# Altium PCB Display_System_pcb.PcbDoc (part 2 of 3)
Units mm, origin at the board's own origin, x right, y up, seen from the top; angles counter-clockwise.
Board outline 72.5 x 81 mm, 4 copper layers (Top Layer, VCC, GND, Bottom Layer); 86 components, 79 nets, 327 pads, 149 vias.
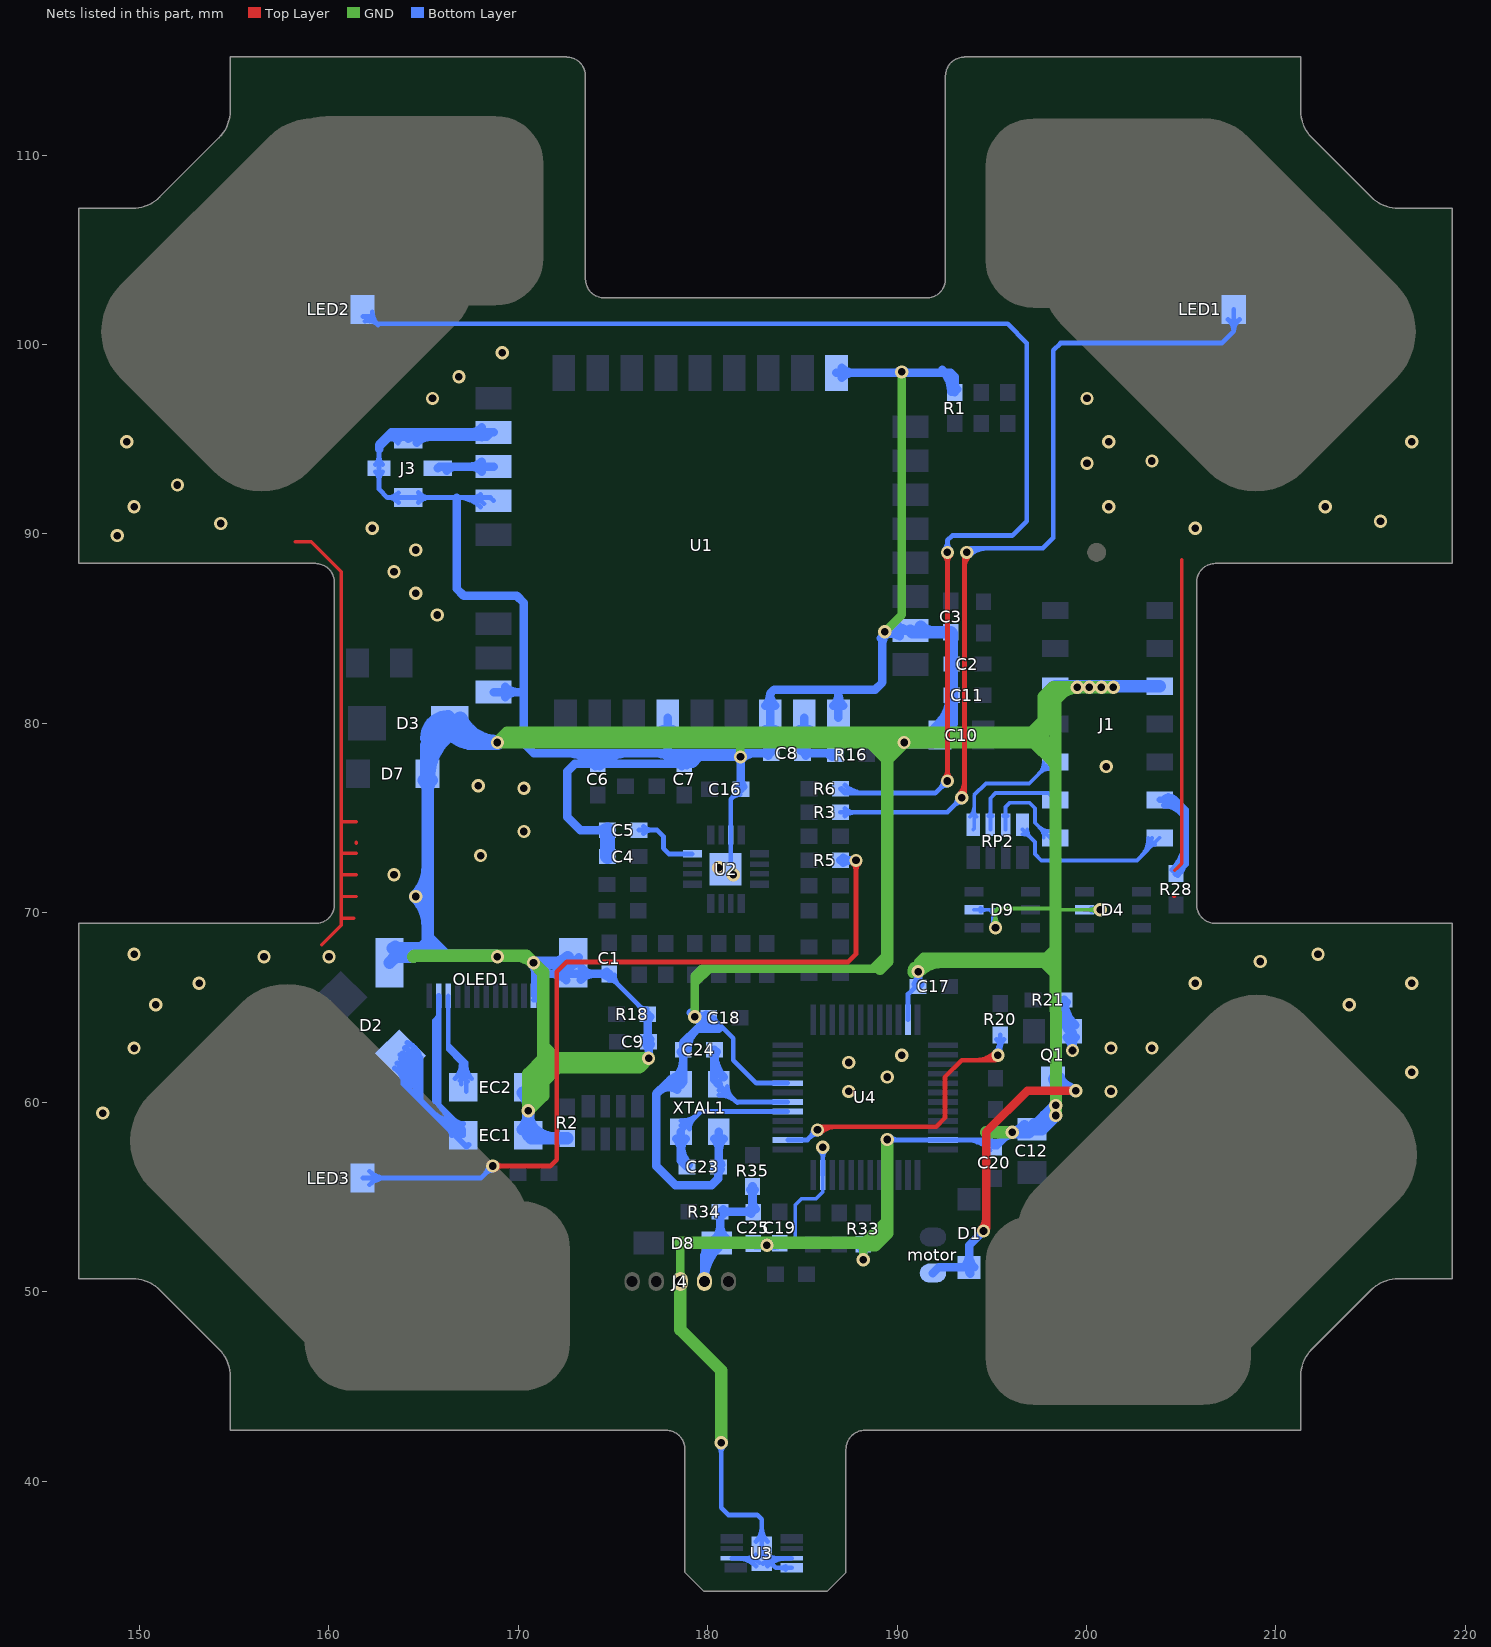
[diagram p4: the nets of this part, all layers, seen from the top]

## Via types
v1: diameter 0.7, hole 0.4, Top Layer to Bottom Layer, tented both sides, 149 vias

## Nets (pads, with @x,y where several pads share a name; then routed paths per layer and width w, separated by ;. In a path a pad name is that pad's centre, name@x,y a point inside that pad or via, vN(x,y) a via of type N, cw(c..) or ccw(c..) an arc to the next point about the centre after c; other vN are vias at no path point) (continued)
GND: C1.1 C2.1 C3.1 C4.1 C5.1 C6.1 C7.1 C8.1 C9.2 C10.2 C11.1 C12.2 C16.2 C17.1 C18.1 C19.1 C20.2 C23.2 C24.2 C25.1 D3.2 D4.2 D7.2 D9.2 EC1.2 EC2.2 J1.3 J1.10 J3.1 J3.2 J3.4 J4.3 OLED1.1 OLED1.13 OLED1.14 Q1.2 R1.1 R2.1 R18.1 R21.1 R33.1 U1.1 U1.5 U1.7 U1.17 U1.24 U1.26 U1.28 U1.31 U2.7 U2.17 U3.2 U3.7 U3.8 U4.8 U4.23 U4.35 U4.47 XTAL1.2 XTAL1.4 | length 690.3
  Top Layer w0.178: 158.229,89.595 159.083,89.595 160.671,88.008 160.671,69.358 159.639,68.326 ; 160.671,69.723 161.335,69.723 ; 160.676,74.808 161.459,74.808 ; 160.798,70.866 161.459,70.866 ; 160.798,72.009 161.459,72.009 ; 160.798,73.152 161.459,73.152 ; 161.459,73.66 161.459,73.745 ; 204.597,70.866 204.654,70.866 ; 204.654,72.241 205.022,72.608 ; 204.78,72.366 205.022,72.608 ; 205.022,88.645 205.022,72.608
  GND w0.2: v1@195.022,69.392 ccw(c194.595,69.819) 195.199,69.819 ccw(c195.803,69.819) v1@195.376,69.392 ; v1@195.199,69.342 195.199,70.104 195.326,70.231 198.36,70.231 ; 198.421,70.165 v1(200.726,70.165) ; v1@200.549,69.988 ccw(c200.122,69.561) 200.122,70.165 ccw(c200.122,70.769) v1@200.549,70.342
  GND w0.45: J4.3@178.438,50.77 ccw(c178.14,51.068) 178.562,51.068 ccw(c178.984,51.068) J4.3@178.686,50.77 ; J4.3@178.562,50.546 178.562,52.465 ; v1(179.324,64.516) 179.324,66.294 179.337,66.307 ; v1(181.737,78.232) 181.737,78.867 ; v1(188.214,51.689) 188.214,52.451 ; 188.976,67.056 188.722,67.056 ; 189.103,67.056 188.722,67.056 ; v1(189.357,84.836) 190.246,85.725 v1(190.246,98.552) ; 189.484,67.818 188.722,67.056 ; v1@190.805,66.79 cw(c191.165,66.924) 190.893,67.195 ; v1@190.88,67.133 cw(c191.306,66.707) 191.306,67.31 ; v1@191.198,66.815 cw(c192.393,65.621) 192.393,67.31 ; v1@191.227,66.947 cw(c191.887,67.193) 191.389,67.691 ; 198.36,66.675 197.725,67.31 197.485,67.31 ; 198.36,67.31 197.485,67.31 ; 198.36,67.691 197.866,67.691 ; 198.36,68.185 197.866,67.691 ; 179.337,66.307 180.086,67.056 ; 179.337,66.307 179.337,66.688 179.705,67.056 180.086,67.056 ; 180.086,67.056 188.722,67.056 ; 191.389,67.691 197.866,67.691 ; 191.389,67.691 191.11,67.412 v1(191.11,66.904) 191.516,67.31 197.485,67.31
  GND w0.65: 164.465,67.691 164.515,67.741 170.444,67.741 v1(170.815,67.37) 171.323,66.862 171.323,63.246 ; 169.859,67.741 cw(c169.859,66.414) v1@170.797,67.352 ; v1@170.518,59.581 ccw(c169.572,60.527) 170.91,60.527 ; 170.815,60.579 172.085,61.849 ; 170.91,59.937 170.91,60.928 171.323,60.515 ; J4.3@178.562,50.546 178.562,48.006 180.721,45.847 v1(180.721,42.037) ; 178.562,52.592 186.944,52.592 ; 182.767,52.592 cw(c182.767,52.098) v1@183.116,52.447 ; v1@183.152,52.447 cw(c183.501,52.098) 183.501,52.592 ; 187.579,52.578 188.214,52.578 ; 187.579,52.592 186.944,52.592 ; 188.228,52.592 186.944,52.592 ; 188.835,52.465 188.228,52.465 ; 189.086,79.502 cw(c189.086,77.707) v1@190.355,78.976 ; 189.103,67.056 189.484,67.437 189.484,67.818 189.484,78.105 ; v1(189.484,58.039) 189.484,53.721 ; v1@190.391,78.976 cw(c191.66,77.707) 191.66,79.502 ; 194.691,58.42 v1(196.088,58.42) ; 198.247,77.978 197.231,78.994 ; v1@198.39,59.309 198.36,70.231 198.36,78.64 ; 198.607,81.513 cw(c199.517,80.603) v1@199.517,81.89 ; 198.755,81.661 cw(c199.348,81.068) v1@199.512,81.89 ; v1(201.422,81.915) v1(200.152,81.915) v1(199.517,81.915) 199.009,81.915 ; v1(170.536,59.563) 171.323,60.35 171.323,61.404 171.221,61.302 170.536,61.302 v1(170.536,59.563) ; v1(170.536,59.563) 170.536,61.507 171.323,62.293 171.323,62.357 ; 171.323,62.357 171.323,63.246 ; 171.323,62.357 171.323,61.849 172.085,61.849 ; 171.323,63.246 171.323,62.992 171.983,62.332 v1(176.886,62.332) 176.403,61.849 172.085,61.849 ; 188.228,52.465 189.484,53.721 ; 188.228,52.465 188.214,52.451 188.849,52.451 189.484,53.086 189.484,53.721 ; 188.595,78.994 v1(168.91,78.994) 169.418,79.502 197.104,79.502 197.739,80.137 ; 188.595,78.994 189.484,78.994 ; 188.595,78.994 189.484,78.105 ; 189.484,78.105 189.484,78.994 ; 189.484,78.105 v1(190.373,78.994) ; 189.484,78.994 v1(190.373,78.994) ; v1(190.373,78.994) 197.231,78.994 ; 197.231,78.994 198.006,78.994 198.36,78.64 ; 197.231,78.994 197.739,79.502 197.739,80.137 ; 197.739,80.137 197.739,81.407 198.247,81.915 199.009,81.915 ; 198.36,78.64 198.36,81.266 199.009,81.915
  Bottom Layer w0.2: C19.1@183.819,52.562 184.388,52.562 ; C19.1@184.075,52.393 cw(c184.388,52.187) 184.388,52.562 ; C19.1@184.075,52.731 ccw(c184.388,52.937) 184.388,52.562 ; U4.47@186.08,56.167 186.08,55.27 185.72,54.91 184.958,54.91 184.625,54.577 184.625,52.799 184.388,52.562 ; D9.2@194.056,70.165 194.884,70.165 ; D9.2@194.412,70.059 cw(c194.668,69.803) 194.668,70.165 cw(c194.668,70.527) D9.2@194.412,70.271 ; v1@195.022,69.392 ccw(c194.743,69.671) 195.138,69.671 ; 195.072,69.573 ccw(c195.472,69.573) v1@195.229,69.255 ; v1@195.138,69.276 195.138,70.165 194.884,70.165 ; 195.138,69.966 ccw(c195.95,69.966) v1@195.376,69.392 ; v1@195.199,69.342 195.072,69.469 195.072,69.977 ; v1@195.351,69.414 cw(c195.781,69.977) 195.072,69.977 ; R21.1@198.602,65.188 cw(c198.079,64.665) 198.819,64.665 cw(c199.558,64.665) R21.1@199.035,65.188 ; Q1.2@198.819,64.263 ccw(c199.488,64.263) Q1.2@199.108,63.712 ; 198.819,64.644 ccw(c199.75,64.644) Q1.2@199.222,63.876 ; R21.1@198.819,65.024 ccw(c200.012,65.024) Q1.2@199.335,64.041 ; Q1.2@198.923,63.296 cw(c198.613,62.82) v1@199.181,62.82 ; v1@199.086,62.915 ccw(c198.857,63.144) Q1.2@199.181,63.144 ; Q1.2@199.181,63.539 ccw(c200.064,63.539) v1@199.44,62.915 ; v1(199.263,62.738) v1@199.181,62.82 ; Q1.2@199.439,63.296 ccw(c199.749,62.82) v1@199.181,62.82 ; Q1.2@199.449,64.206 cw(c200.275,65.405) R21.1@198.819,65.405 198.819,64.117 Q1.2@199.181,63.754 v1@199.181,62.82 ; D4.2@199.898,70.165 v1(200.726,70.165) ; D4.2@200.254,70.059 cw(c200.51,69.803) 200.51,70.165 cw(c200.51,70.527) D4.2@200.254,70.271 ; v1@200.549,69.988 ccw(c200.122,69.561) 200.122,70.165 ccw(c200.122,70.769) v1@200.549,70.342 ; 194.884,70.165 195.072,69.977
  Bottom Layer w0.25: J3.4@162.467,93.278 cw(c161.997,92.808) 162.661,92.808 cw(c163.325,92.808) J3.4@162.855,93.278 ; J3.4@162.467,93.666 ccw(c161.997,94.136) 162.661,94.136 ccw(c163.325,94.136) J3.4@162.855,93.666 ; J3.1@163.659,94.8 ccw(c163.221,94.479) 163.221,95.022 ; J3.1@163.659,95.244 cw(c163.221,95.565) 163.221,95.022 ; J3.2@163.688,91.665 ccw(c163.094,91.107) 163.094,91.922 ccw(c163.094,92.737) J3.2@163.688,92.179 ; J3.2@164.726,91.657 cw(c165.366,91.017) 165.366,91.922 cw(c165.366,92.827) J3.2@164.726,92.187 ; J3.1@164.726,94.757 cw(c165.366,94.117) 165.366,95.022 cw(c165.366,95.927) J3.1@164.726,95.287 ; D3.2@165.989,80.01 D3.2@166.395,80.01 ; 166.397,95.022 ccw(c166.397,97.316) U1.7@168.019,95.694 ; 166.812,91.922 cw(c166.812,90.215) U1.5@168.019,91.422 ; 167.001,95.022 ccw(c167.001,96.712) U1.7@168.196,95.517 ; 167.416,91.922 cw(c167.416,90.819) U1.5@168.196,91.599 ; 167.604,91.922 ccw(c167.604,92.509) U1.5@168.019,92.094 ; 167.604,95.022 ccw(c167.604,96.109) U1.7@168.373,95.34 ; U1.5@168.705,91.758 168.541,91.922 166.751,91.922 J3.2@164.211,91.922 163.094,91.922 162.661,92.355 J3.4@162.661,93.472 162.661,94.462 163.221,95.022 ; U1.7@168.705,95.358 168.369,95.022 J3.1@164.211,95.022 163.221,95.022 ; v1@170.757,67.152 cw(c170.65,66.748) 171.069,66.748 ; OLED1.1@170.803,66.142 ccw(c170.574,66.581) 171.069,66.581 ; OLED1.1@170.815,65.405 171.323,65.405 ; v1@170.815,67.145 cw(c170.815,66.602) 171.199,66.986 cw(c171.583,67.37) v1@171.04,67.37 ; v1(170.815,67.37) OLED1.1@170.815,65.62 ; v1@170.821,67.394 cw(c170.736,67.073) 171.069,67.073 ; OLED1.1@170.824,65.597 cw(c170.955,65.252) 171.215,65.513 ; v1@170.833,67.388 cw(c170.475,67.03) 170.981,67.03 ; OLED1.1@170.919,65.921 ccw(c170.79,66.168) 171.069,66.168 ; v1@170.974,67.211 ccw(c171.358,66.827) 170.815,66.827 ccw(c170.272,66.827) 170.656,67.211 cw(c169.871,66.426) 170.981,66.426 ; 170.981,65.978 cw(c170.957,65.978) 170.974,65.961 ccw(c170.745,66.19) 171.069,66.19 ; 170.981,66.581 cw(c170.354,66.581) 170.797,66.138 ccw(c170.141,66.794) 171.069,66.794 ; 171.035,65.699 ccw(c171.006,65.755) 171.069,65.755 ; 171.069,66.548 171.704,67.183 ; 171.141,65.46 ccw(c170.815,65.134) 170.815,65.595 cw(c170.815,64.827) 171.358,65.37 ; 171.196,66.802 171.196,65.405 170.981,65.62 ; 171.323,66.862 171.069,67.116 ; 171.323,67.37 171.323,65.405 ; 171.45,67.183 171.069,66.802 ; C1.1@174.802,66.457 cw(c174.802,65.898) 175.197,66.293 ; C1.1@174.802,66.777 174.802,66.689 R18.1@176.847,64.643 ; C1.1@175.083,66.739 ccw(c175.883,66.739) 175.318,66.173 ; 176.302,65.188 cw(c175.757,64.643) R18.1@176.528,64.643 ; 176.394,65.096 ccw(c176.809,65.512) R18.1@176.809,64.924 ; C9.2@176.847,63.234 C9.2@176.886,63.196 ; C24.2@178.689,62.813 C24.2@178.714,62.788 ; C18.1@180.011,64.516 180.213,64.516 181.356,63.373 181.356,62.23 182.569,61.017 U4.8@184.23,61.017 ; C18.1@180.099,64.185 cw(c180.099,63.109) 180.86,63.869 ; C18.1@180.38,64.466 ccw(c180.663,64.466) C18.1@180.463,64.266 ; v1@180.562,41.878 cw(c180.178,41.494) 180.721,41.494 cw(c181.264,41.494) v1@180.88,41.878 ; C23.2@180.569,56.592 C23.2@180.594,56.617 ; v1(180.721,42.037) 180.721,38.608 181.102,38.227 182.626,38.227 182.86,37.993 U3.2@182.86,36.175 ; U2.17@181.229,72.581 U2.7@181.229,74.105 181.229,75.998 C16.2@181.762,76.531 ; 181.248,76.017 ccw(c180.776,76.489) C16.2@181.443,76.519 ; U3.2@181.283,35.941 182.626,35.941 U3.2@182.86,36.175 ; 181.309,76.078 cw(c181.724,75.662) C16.2@181.724,76.25 ; U3.2@181.554,35.941 cw(c181.554,34.519) U3.2@182.559,35.524 ; 182.114,35.941 ccw(c182.114,36.571) U3.2@182.559,36.126 ; 182.157,35.941 cw(c182.157,35.122) U3.2@182.736,35.701 ; U3.2@182.559,36.826 ccw(c181.834,37.551) 182.86,37.551 ccw(c183.886,37.551) U3.2@183.161,36.826 ; U3.2@182.88,36.195 U3.2@182.86,36.175 ; U3.2@182.921,35.661 cw(c183.112,35.145) 183.501,35.534 ; U3.2@182.984,35.701 cw(c183.563,35.122) 183.563,35.941 ; U3.2@183.161,35.524 cw(c184.166,34.519) U3.7@184.166,35.941 ; U3.2@183.161,36.126 ccw(c183.606,36.571) 183.606,35.941 ; C8.1@183.305,78.24 C8.1@183.305,78.436 ; C8.1@183.305,78.486 C8.1@183.305,78.436 ; C8.1@183.363,78.436 C8.1@183.305,78.436 ; U3.8@184.124,35.345 ccw(c183.91,35.131) 183.91,35.433 ccw(c183.91,35.735) U3.8@184.124,35.521 ; U3.8@184.437,35.433 183.602,35.433 U3.2@183.094,35.941 ; U3.7@184.437,35.941 U3.2@183.094,35.941 ; v1@185.921,57.474 cw(c185.537,57.089) 186.08,57.089 cw(c186.624,57.089) v1@186.239,57.474 ; U4.47@186.08,56.167 v1(186.08,57.633) ; v1@189.506,58.017 U4.35@192.43,58.017 194.737,58.017 C20.2@195.122,57.633 195.301,57.633 v1(196.088,58.42) ; v1@189.643,57.88 cw(c189.975,57.548) 189.975,58.017 ; v1@189.643,58.198 ccw(c190.079,58.634) 190.079,58.017 ; U4.23@190.58,64.367 190.58,65.715 C17.1@191.11,66.244 ; 193.606,58.017 cw(c193.606,56.154) C20.2@194.923,57.472 ; 194.209,58.017 cw(c194.209,56.758) C20.2@195.1,57.648 ; C20.2@194.813,58.017 cw(c194.813,57.361) C20.2@195.277,57.825 ; C20.2@195.122,57.702 ccw(c195.122,58.301) 195.546,57.878 ; C20.2@195.122,57.952 ccw(c195.122,59.155) v1@195.972,58.304 ; v1@195.863,58.42 cw(c195.32,58.42) 195.704,58.036 cw(c196.088,57.652) v1@196.088,58.195 ; OLED1.1@170.815,65.62 171.108,65.62 171.323,65.405 ; OLED1.1@170.815,65.62 170.981,65.62 ; 170.981,65.62 170.981,67.028 171.069,67.116 ; 171.069,66.802 171.069,65.659 171.323,65.405 ; 171.069,66.802 171.069,67.116 ; U3.2@182.86,36.175 U3.2@183.094,35.941
  Bottom Layer w0.45: 162.661,94.462 162.661,94.716 163.303,95.358 ; 162.762,94.817 cw(c163.732,93.847) J3.1@163.994,95.194 ; J3.1@163.687,95.002 ccw(c163.303,94.973) 163.303,95.358 ; J3.1@164.211,95.022 J3.1@164.547,95.358 ; J3.1@164.337,95.146 cw(c164.85,94.633) J3.1@164.85,95.358 ; J3.1@164.655,94.828 cw(c165.936,93.547) 165.936,95.358 ; 166.751,91.922 166.751,87.122 167.132,86.741 169.926,86.741 170.307,86.36 170.307,81.658 ; U1.7@168.09,95.093 ccw(c167.45,94.453) 167.45,95.358 ccw(c167.45,96.263) U1.7@168.09,95.623 ; U1.1@168.705,81.658 170.307,81.658 ; U1.7@168.705,95.358 J3.1@164.547,95.358 ; U1.1@169.32,81.393 cw(c169.96,80.753) 169.96,81.658 cw(c169.96,82.563) U1.1@169.32,81.923 ; EC1.2@170.165,58.639 ccw(c169.269,59.535) 170.536,59.535 ccw(c171.803,59.535) EC1.2@170.907,58.639 ; EC2.2@170.165,60.436 cw(c169.269,59.54) 170.536,59.54 cw(c171.803,59.54) EC2.2@170.907,60.436 ; EC1.2@170.536,58.395 EC2.2@170.536,60.935 ; 171.111,66.777 173.99,66.777 ; 171.543,66.777 ccw(c171.543,68.192) OLED1.14@172.544,67.191 ; 171.752,66.777 cw(c171.752,65.657) OLED1.14@172.544,66.449 ; 172.497,78.436 cw(c172.497,76.218) C6.1@174.066,77.786 ; OLED1.14@172.915,67.37 OLED1.14@173.211,67.666 ; OLED1.14@173.211,66.777 173.99,66.777 ; 173.583,78.436 cw(c173.583,77.304) C6.1@174.384,78.104 ; 173.686,78.423 cw(c173.718,78.39) 173.718,78.436 ; C6.1@174.004,78.104 cw(c174.805,77.304) 174.805,78.436 ; C6.1@174.066,77.748 ccw(c173.756,77.438) 173.756,77.876 ccw(c173.756,78.314) C6.1@174.066,78.005 ; C6.1@174.322,77.748 cw(c174.632,77.438) 174.632,77.876 cw(c174.632,78.314) C6.1@174.322,78.005 ; C6.1@174.322,77.786 cw(c175.891,76.218) 175.891,78.436 ; C5.1@174.56,74.244 ccw(c174.251,73.934) 174.251,74.372 ccw(c174.251,74.81) C5.1@174.56,74.5 ; 174.67,78.436 cw(c174.67,78.39) 174.702,78.423 ; C1.1@174.674,66.648 ccw(c174.364,66.339) 174.364,66.777 ccw(c174.364,67.215) C1.1@174.674,66.905 ; C5.1@174.727,74.372 173.278,74.372 172.593,75.057 172.593,77.47 172.999,77.876 C6.1@174.194,77.876 C7.1@178.766,77.876 179.222,77.876 179.578,78.232 ; C1.1@174.802,66.777 173.99,66.777 ; C9.2@176.719,63.324 ccw(c176.41,63.634) 176.847,63.634 ccw(c177.285,63.634) C9.2@176.976,63.324 ; R18.1@176.719,64.515 cw(c176.41,64.205) 176.847,64.205 cw(c177.285,64.205) R18.1@176.976,64.515 ; C9.2@176.757,63.068 cw(c176.448,62.758) 176.886,62.758 cw(c177.324,62.758) C9.2@177.014,63.068 ; C9.2@176.847,63.234 R18.1@176.847,64.643 ; v1(176.886,62.332) C9.2@176.886,63.196 ; 177.069,78.436 cw(c177.069,76.218) C7.1@178.638,77.786 ; 177.403,60.563 cw(c177.967,59.999) XTAL1.4@178.403,60.667 ; 177.419,60.579 cw(c178.343,59.654) XTAL1.4@178.615,60.933 ; U1.31@177.64,79.693 cw(c177,79.053) 177.905,79.053 cw(c178.81,79.053) U1.31@178.17,79.693 ; 177.795,60.955 cw(c178.276,60.474) XTAL1.4@178.649,61.044 ; 177.905,78.541 U1.31@177.905,80.308 ; 178.005,61.165 cw(c178.548,60.621) XTAL1.4@178.708,61.373 ; 178.155,78.436 cw(c178.155,77.304) C7.1@178.956,78.104 ; 178.258,78.423 cw(c178.29,78.39) 178.29,78.436 ; XTAL1.4@178.336,60.724 ccw(c177.8,60.234) 177.8,60.96 ; XTAL1.4@178.336,61.196 cw(c177.8,61.686) 177.8,60.96 ; XTAL1.4@178.347,61.332 ccw(c177.458,62.221) 178.714,62.221 ; C7.1@178.576,78.104 cw(c179.377,77.304) 179.377,78.436 ; C24.2@178.586,62.66 cw(c178.276,62.35) 178.714,62.35 cw(c179.152,62.35) C24.2@178.843,62.66 ; C7.1@178.638,77.748 ccw(c178.328,77.438) 178.328,77.876 ccw(c178.328,78.314) C7.1@178.638,78.005 ; C7.1@178.835,78.082 ccw(c179.094,78.716) 179.578,78.232 ; C7.1@178.894,77.786 cw(c180.463,76.218) 180.463,78.436 ; C7.1@178.928,77.833 cw(c179.578,77.503) 179.578,78.232 ; C24.2@178.934,62.788 cw(c180.324,62.788) 179.341,63.771 ; v1@179.113,64.727 ccw(c179.589,65.203) C18.1@179.931,64.622 ; C7.1@179.122,78.232 179.578,78.232 ; 179.242,78.436 cw(c179.242,78.39) 179.274,78.423 ; v1@179.464,64.516 cw(c179.464,63.907) C18.1@179.894,64.338 ; v1@179.525,64.315 ccw(c179.894,64.685) C18.1@180.159,64.234 ; 179.959,63.881 v1(179.324,64.516) 180.011,64.516 C18.1@180.061,64.466 ; XTAL1.2@180.347,58.088 cw(c179.749,57.49) 180.594,57.49 cw(c181.439,57.49) XTAL1.2@180.841,58.088 ; C23.2@180.44,56.464 cw(c180.131,56.154) 180.569,56.154 cw(c181.007,56.154) C23.2@180.697,56.464 ; C23.2@180.478,56.72 ccw(c180.199,56.999) 180.594,56.999 ; C23.2@180.569,56.592 180.569,55.982 180.213,55.626 178.308,55.626 177.292,56.642 177.292,60.452 177.8,60.96 ; C23.2@180.594,56.617 XTAL1.2@180.594,58.46 ; 180.594,57.061 ccw(c181.075,57.061) C23.2@180.735,56.72 ; 180.594,63.881 179.451,63.881 178.714,63.144 C24.2@178.714,62.788 178.714,61.08 XTAL1.4@178.594,60.96 177.8,60.96 ; 180.943,78.436 cw(c180.943,77.438) 181.649,78.144 cw(c181.374,77.869) 181.762,77.869 ; v1@181.61,78.232 179.578,78.232 ; C16.2@181.634,76.659 ccw(c181.324,76.969) 181.762,76.969 ccw(c182.2,76.969) C16.2@181.891,76.659 ; C16.2@181.762,76.531 v1@181.762,78.08 ; v1@181.825,78.144 cw(c182.531,77.438) 182.531,78.436 ; C25.1@182.422,52.553 182.524,52.451 183.708,52.451 C19.1@183.819,52.562 cw(c183.516,52.865) v1@183.22,52.555 ; C25.1@182.55,52.643 ccw(c183.013,53.106) v1@183.013,52.451 ; U1.28@183.04,79.693 cw(c182.4,79.053) 183.305,79.053 cw(c184.21,79.053) U1.28@183.57,79.693 ; U1.28@183.04,80.923 ccw(c182.4,81.563) 183.305,81.563 ccw(c184.21,81.563) U1.28@183.57,80.923 ; C8.1@183.196,78.308 ccw(c182.887,77.998) 182.887,78.436 ccw(c182.887,78.874) C8.1@183.196,78.564 ; v1@183.205,52.451 ccw(c183.205,53.138) C19.1@183.691,52.652 ; C8.1@183.305,78.436 170.815,78.436 170.307,78.944 170.307,81.658 ; C8.1@183.305,78.486 U1.28@183.305,80.308 183.305,81.578 183.515,81.788 186.905,81.788 ; 183.305,78.921 ccw(c183.81,78.921) C8.1@183.453,78.564 ; U1.26@186.64,80.923 ccw(c186,81.563) 186.905,81.563 ccw(c187.81,81.563) U1.26@187.17,80.923 ; U1.17@186.805,98.508 192.83,98.508 193.04,98.298 R1.1@193.04,97.472 193.04,98 192.532,98.508 ; U1.26@186.905,80.308 186.905,81.788 ; U1.17@187.07,98.243 cw(c187.71,97.603) 187.71,98.508 cw(c187.71,99.413) U1.17@187.07,98.773 ; R33.1@188.086,52.348 cw(c187.776,52.038) 188.214,52.038 cw(c188.652,52.038) R33.1@188.342,52.348 ; v1(188.214,51.689) R33.1@188.214,52.514 ; 189.146,84.498 cw(c189.701,83.943) U1.24@190.144,84.591 ; 189.23,84.228 cw(c189.965,84.228) 189.445,84.748 cw(c189.815,84.378) U1.24@189.815,84.901 ; v1@189.363,84.715 cw(c190.087,83.991) U1.24@190.376,84.973 ; v1@189.53,84.882 cw(c190.012,84.399) U1.24@190.397,84.963 ; 189.838,98.508 ccw(c189.838,98.96) v1@190.158,98.64 ; U1.24@190.068,84.659 ccw(c189.549,84.222) v1@189.549,84.901 ; U1.24@190.068,85.142 cw(c189.549,85.58) v1@189.549,84.901 ; v1@190.334,98.64 ccw(c190.654,98.96) 190.654,98.508 ; U1.24@190.705,84.901 v1@189.549,84.901 ; C17.1@190.981,66.245 ccw(c190.672,66.555) 191.11,66.555 ccw(c191.548,66.555) C17.1@191.238,66.245 ; C17.1@191.11,66.244 v1@191.11,67.031 ; 192.384,98.656 cw(c191.239,97.511) R1.1@192.859,97.511 ; C3.1@192.746,84.901 C3.1@192.836,84.811 ; R1.1@192.912,97.639 ccw(c192.602,97.949) 193.04,97.949 ccw(c193.478,97.949) R1.1@193.168,97.639 ; R21.1@198.69,65.277 cw(c198.381,64.967) 198.819,64.967 cw(c199.256,64.967) R21.1@198.947,65.277 ; Q1.2@198.819,64.117 199.263,63.672 v1(199.263,62.738) ; 198.819,64.397 ccw(c199.701,64.397) Q1.2@199.112,63.74 ; R21.1@198.819,65.405 ccw(c200.604,65.405) Q1.2@199.412,64.076 ; Q1.2@198.95,63.432 cw(c198.329,62.735) v1@199.263,62.735 ; v1@199.263,63.052 cw(c199.82,63.052) Q1.2@199.426,63.445 ; 163.303,95.358 J3.1@164.547,95.358 ; 173.99,66.777 ccw(c173.99,65.861) 173.307,66.471 cw(c173.99,65.861) 173.99,66.777 ; 173.99,66.777 cw(c173.99,67.552) 173.349,67.116 ccw(c173.99,67.552) 173.99,66.777 ; 186.905,81.788 188.849,81.788 189.23,82.169 189.23,84.582 v1@189.549,84.901
  Bottom Layer w0.65: OLED1.13@163.215,67.37 163.536,67.691 164.465,67.691 ; OLED1.13@163.386,68.135 164.909,68.135 ; OLED1.13@163.516,67.619 cw(c164.761,66.374) 164.761,68.135 ; OLED1.13@163.516,68.221 ccw(c164.673,69.378) 164.673,67.741 ; OLED1.13@163.564,68.162 ccw(c164.465,68.787) 164.465,67.691 ; OLED1.13@163.586,67.741 165.227,67.741 ; v1@164.574,70.848 cw(c162.999,69.273) 165.227,69.273 ; v1@164.574,70.884 ccw(c162.999,72.459) 165.227,72.459 ; D7.2@165.008,76.997 cw(c164.479,76.468) 165.227,76.468 cw(c165.975,76.468) D7.2@165.446,76.997 ; 165.227,68.453 164.909,68.135 ; 165.227,68.707 166.193,67.741 ; D7.2@165.227,77.343 165.227,67.741 ; v1@168.86,67.741 165.227,67.741 ; EC1.2@170.235,58.568 ccw(c169.51,59.294) 170.536,59.294 ccw(c171.562,59.294) 170.837,58.568 ccw(c171.961,59.692) 171.961,58.102 ; EC2.2@170.235,60.507 cw(c169.51,59.782) 170.536,59.782 cw(c171.562,59.782) EC2.2@170.837,60.507 ; EC2.2@170.536,60.808 EC1.2@170.536,58.268 170.701,58.102 R2.1@172.593,58.102 ; v1(170.815,67.37) OLED1.14@172.915,67.37 ; OLED1.14@172.614,67.069 ccw(c171.889,66.344) 171.889,67.37 ccw(c171.889,68.396) OLED1.14@172.614,67.671 ; v1(190.373,78.994) 191.877,78.994 C10.2@192.268,79.385 192.888,80.005 C11.1@192.888,81.484 ; U1.24@190.705,84.901 190.795,84.811 C3.1@192.836,84.811 192.888,84.759 C2.1@192.888,83.135 C11.1@192.888,81.484 ; 191.051,78.994 ccw(c191.051,80.44) C10.2@192.074,79.417 ; U1.24@191.249,85.095 ccw(c191.937,85.783) 191.937,84.811 ; C10.2@192.09,79.756 ccw(c190.619,81.484) C11.1@192.888,81.484 ; C10.2@192.511,79.261 ccw(c191.817,80.077) 192.888,80.077 ; C12.2@196.731,58.744 cw(c196.088,59.219) v1(196.088,58.42) 196.953,58.42 C12.2@197.114,58.581 ; C12.2@197.277,58.856 ccw(c197.28,60.403) v1(198.374,59.309) ; C12.2@197.424,58.89 cw(c198.374,57.94) v1@198.374,59.284 ; C12.2@197.551,58.581 cw(c198.606,58.581) 197.86,59.327 ; 197.955,58.89 ccw(c197.005,59.841) v1@198.349,59.841 ; J1.10@198.349,81.962 J1.3@203.86,81.962 ; 164.465,67.691 164.909,68.135 ; C12.2@197.114,58.581 197.646,58.581 v1(198.374,59.309) ; C12.2@197.114,58.581 v1(198.374,59.841) v1(198.374,59.309)
  Bottom Layer w0.8: D7.2@165.227,77.137 cw(c168.143,77.137) D3.2@166.565,79.589 ; D7.2@165.227,77.343 165.227,78.842 D3.2@166.395,80.01 167.411,78.994 v1(168.91,78.994) cw(c168.91,81.175) D3.2@166.945,80.227 ; 165.227,78.427 cw(c166.31,78.427) D3.2@166.3,79.51 ; 165.227,78.603 cw(c167.2,78.603) D3.2@166.133,80.262 ; 165.227,79.235 cw(c166.302,79.235) D3.2@166.292,80.31 ; 165.371,78.986 ccw(c164.346,80.01) D3.2@165.795,80.01 ; D3.2@165.612,79.227 cw(c166.295,78.544) D3.2@166.295,79.51 ; D3.2@166.225,79.88 ccw(c167.636,80.56) 167.636,78.994 ; D3.2@166.495,79.51 cw(c166.495,78.544) D3.2@167.178,79.227 ; D3.2@166.995,79.988 ccw(c168.249,79.932) 167.361,79.044 ; C4.1@174.727,72.975 C5.1@174.727,74.372
  other v1: 183.134,52.465 148.082,59.436 187.452,60.579 201.295,60.579 189.484,61.341 217.17,61.595 187.452,62.103 190.246,62.484 149.733,62.865 201.295,62.865 203.454,62.865 150.876,65.151 213.868,65.151 153.162,66.294 205.74,66.294 217.17,66.294 209.169,67.437 156.591,67.691 160.02,67.691 168.91,67.691 149.733,67.818 212.217,67.818 195.199,69.215 164.592,70.866 163.449,72.009 181.356,72.009 180.594,72.39 168.021,73.025 170.307,74.295 170.307,76.581 167.894,76.708 201.041,77.724 200.787,81.915 165.735,85.725 164.592,86.868 163.449,88.011 164.592,89.154 148.844,89.916 162.306,90.297 205.74,90.297 154.305,90.551 215.519,90.678 149.733,91.44 201.168,91.44 212.598,91.44 152.019,92.583 200.025,93.726 203.454,93.853 149.352,94.869 201.168,94.869 217.17,94.869 165.481,97.155 200.025,97.155 166.878,98.298 169.164,99.568
MOTOR: R20.2 U4.2 | length 21
  Top Layer w0.25: v1@185.783,58.565 cw(c186.144,58.204) 186.144,58.714 ; v1(185.801,58.547) 185.968,58.714 192.064,58.714 192.532,59.182 192.532,61.341 193.421,62.23 195.199,62.23 v1@195.326,62.357 ; v1@185.96,58.388 cw(c186.747,57.601) 186.747,58.714 ; 194.17,62.23 ccw(c194.17,63.64) v1@195.167,62.643 ; 194.773,62.23 ccw(c194.773,63.037) v1@195.344,62.466
  Bottom Layer w0.25: U4.2@184.23,58.017 185.271,58.017 v1(185.801,58.547) ; v1@185.576,58.547 cw(c185.033,58.547) 185.417,58.163 cw(c185.801,57.779) v1@185.801,58.322 ; v1@195.167,62.643 ccw(c194.476,63.334) R20.2@195.453,63.334 ; R20.2@195.254,63.326 cw(c194.774,62.846) 195.453,62.846 cw(c196.132,62.846) R20.2@195.652,63.326 ; v1(195.326,62.484) 195.453,62.611 R20.2@195.453,63.563
NetC5_2: C5.2 U2.4 | length 4.8
  Bottom Layer w0.25: C5.2@176.378,74.372 177.342,74.372 177.673,74.041 177.673,73.406 177.965,73.114 U2.4@179.197,73.114 ; C5.2@176.615,74.173 cw(c177.095,73.693) 177.095,74.372 cw(c177.095,75.051) C5.2@176.615,74.571
NetC8_2: C8.2 R16.1 U1.27 | length 7.1
  Bottom Layer w0.25: C8.2@185.091,78.359 C8.2@185.014,78.436 185.105,78.436 C8.2@185.105,78.273 ; R16.1@186.676,78.436 R16.1@186.754,78.359
  Bottom Layer w0.45: U1.27@184.84,79.693 cw(c184.2,79.053) 185.105,79.053 cw(c186.01,79.053) U1.27@185.37,79.693 ; C8.2@184.923,78.564 ccw(c184.485,79.003) 185.105,79.003 ; U1.27@185.105,80.308 185.105,78.436 R16.1@186.676,78.436 ; C8.2@185.18,78.308 cw(c185.49,77.998) 185.49,78.436 cw(c185.49,78.874) C8.2@185.18,78.564 ; 186.092,78.436 cw(c186.092,77.735) R16.1@186.587,78.231
NetC23_1: C23.1 U4.5 XTAL1.3 | length 12.8
  Bottom Layer w0.25: XTAL1.3@178.594,58.46 179.651,59.517 U4.5@184.23,59.517 ; XTAL1.3@178.594,58.785 ccw(c178.594,59.57) XTAL1.3@179.149,59.015 ; XTAL1.3@178.594,59.035 ccw(c178.594,60.423) 179.576,59.442 ; XTAL1.3@179.044,58.585 cw(c179.829,58.585) 179.274,59.14
  Bottom Layer w0.45: XTAL1.3@178.347,58.088 cw(c177.749,57.49) 178.594,57.49 cw(c179.439,57.49) XTAL1.3@178.841,58.088 ; 178.594,57.719 ccw(c180.007,57.719) C23.1@179.008,56.72 ; XTAL1.3@178.594,58.46 178.594,56.916 C23.1@178.918,56.592
NetC24_1: C24.1 U4.6 XTAL1.1 | length 10.2
  Bottom Layer w0.25: XTAL1.1@180.594,60.385 cw(c180.594,58.997) 181.576,59.978 ; XTAL1.1@180.594,60.635 cw(c180.594,59.85) XTAL1.1@181.149,60.405 ; XTAL1.1@180.594,60.96 181.537,60.017 U4.6@184.23,60.017 ; XTAL1.1@181.044,60.835 ccw(c181.829,60.835) 181.274,60.28
  Bottom Layer w0.45: C24.1@180.237,62.66 cw(c179.927,62.35) 180.365,62.35 cw(c180.803,62.35) C24.1@180.494,62.66 ; C24.1@180.365,62.482 ccw(c181.991,62.482) XTAL1.1@180.841,61.332 ; C24.1@180.365,62.788 180.365,61.189 XTAL1.1@180.594,60.96
NetC25_2: C25.2 D8.2 J4.4 R34.1 R35.1 | length 16.7
  Bottom Layer w0.25: 179.832,51.921 D8.2@180.489,52.578 D8.2@180.657,52.746 ; C25.2@182.347,54.229 182.372,54.254 C25.2@182.422,54.204
  Bottom Layer w0.45: J4.4@179.708,50.77 ccw(c179.41,51.068) 179.832,51.068 ccw(c180.254,51.068) J4.4@179.956,50.77 ; J4.4@179.832,50.546 179.832,51.921 180.657,52.746 R34.1@180.657,54.229 182.347,54.229 182.372,54.254 R35.1@182.372,55.562 ; J4.4@179.832,50.569 cw(c182.298,50.569) D8.2@180.554,52.313 ; 179.832,51.656 cw(c181.211,51.656) D8.2@180.236,52.631 ; D8.2@180.424,52.843 ccw(c179.86,53.407) 180.657,53.407 ; R34.1@180.529,54.101 cw(c180.22,53.791) 180.657,53.791 cw(c181.095,53.791) R34.1@180.786,54.101 ; 180.657,53.559 ccw(c181.67,53.559) D8.2@180.954,52.843 ; R34.1@180.824,54.101 cw(c181.134,53.791) 181.134,54.229 cw(c181.134,54.667) R34.1@180.824,54.357 ; 181.953,54.229 ccw(c181.953,54.71) C25.2@182.294,54.37 ; 182.015,54.229 cw(c182.015,53.834) C25.2@182.294,54.113 ; R35.1@182.244,55.396 cw(c181.934,55.086) 182.372,55.086 cw(c182.81,55.086) R35.1@182.5,55.396 ; 182.372,54.8 ccw(c182.981,54.8) C25.2@182.55,54.37
NetD1_2: D1.2 motor.1 Q1.3 | length 24.7
  Top Layer w0.45: v1@194.476,53.301 ccw(c193.924,53.853) 194.704,53.853 ; v1(194.564,53.213) 194.704,53.353 194.704,58.433 196.887,60.616 v1(199.427,60.616)
  Bottom Layer w0.45: motor.1@191.897,50.99 192.214,51.308 D1.2@193.802,51.308 ; D1.2@193.537,51.297 ccw(c192.897,51.937) 193.802,51.937 ccw(c194.707,51.937) D1.2@194.067,51.297 ; D1.2@193.865,50.968 193.802,51.032 D1.2@193.802,51.286 D1.2@193.802,51.308 ; v1(194.564,53.213) 193.802,52.451 D1.2@193.802,51.308 ; Q1.3@198.191,61.248 ccw(c198.901,61.358) 198.901,60.64 ; Q1.3@198.231,61.254 198.845,60.64 v1@199.427,60.64 ; Q1.3@198.247,61.341 198.273,61.325 v1@199.427,60.64 ; Q1.3@198.332,60.857 cw(c198.646,59.623) v1@199.296,60.717 ; Q1.3@198.628,61.355 ccw(c199.313,61.529) 198.952,60.922 ; Q1.3@198.636,61.317 ccw(c199.427,61.44) v1@199.427,60.64 ; 199.067,60.64 cw(c199.067,60.256) v1@199.338,60.527 ; 199.135,60.813 cw(c198.945,60.493) v1@199.306,60.585
NetD2_1: D2.1 EC1.1 OLED1.11 | length 68.5
  Bottom Layer w0.25: OLED1.11@165.815,65.62 165.815,59.864 166.853,58.826 EC1.1@167.107,58.826 ; 165.825,59.854 cw(c164.238,58.268) EC1.1@166.482,58.268 ; 166.252,59.427 cw(c165.092,58.268) EC1.1@166.732,58.268 ; 166.56,59.119 ccw(c167.107,59.667) EC1.1@167.107,58.893 ; EC1.1@166.678,59.001 cw(c165.945,58.268) EC1.1@166.982,58.268
  Bottom Layer w0.3: D2.1@163.487,61.801 cw(c163.01,60.983) 163.957,60.983 cw(c165.167,60.983) D2.1@164.364,61.887 ; D2.1@163.639,62.06 cw(c163.315,61.505) D2.1@163.957,61.505 ; D2.1@163.685,61.72 cw(c163.397,60.561) 164.592,60.561 ; D2.1@163.7,62.03 cw(c163.025,60.325) 164.859,60.325 ; D2.1@163.757,62.011 cw(c163.492,60.944) 164.592,60.944 ; D2.1@163.795,62.519 164.592,61.722 ; D2.1@163.811,62.309 cw(c163.2,60.767) 164.859,60.767 ; D2.1@163.83,62.303 cw(c163.588,61.328) 164.592,61.328 ; D2.1@163.902,62.594 cw(c163.683,61.711) 164.592,61.711 ; D2.1@163.921,62.588 cw(c163.375,61.208) 164.859,61.208 ; D2.1@163.957,61.341 164.401,60.896 164.401,61.341 ; D2.1@163.957,62.23 163.957,60.985 164.859,60.084 ; D2.1@164.031,62.867 cw(c163.55,61.649) 164.859,61.649 ; D2.1@164.142,63.146 cw(c163.724,62.091) 164.859,62.091 ; 164.211,61.341 164.401,61.341 ; D2.1@164.211,61.595 164.401,61.595 ; D2.1@164.401,61.785 164.401,61.595 ; 164.592,60.706 164.592,61.722 ; 164.719,60.579 164.719,61.595 164.592,61.722 ; D2.1@164.859,62.357 164.859,60.084 ; 165.345,59.597 ccw(c167.107,61.36) EC1.1@167.107,58.868 ; 165.815,64.516 165.608,64.309 165.608,60.071 EC1.1@167.107,58.572 ; OLED1.11@165.815,65.62 165.815,59.864 EC1.1@166.853,58.826 ; 165.857,59.085 ccw(c167.107,60.335) EC1.1@167.107,58.568 ; EC1.1@166.369,58.573 ccw(c167.107,59.311) EC1.1@167.107,58.268 ; EC1.1@166.388,58.554 cw(c166.102,58.268) EC1.1@166.507,58.268 ; EC1.1@167.386,57.76 167.284,57.658 164.859,60.084 ; 164.401,61.341 164.401,61.595 ; EC1.1@166.507,58.268 ccw(c164.324,58.268) 165.867,59.812 cw(c164.324,58.268) EC1.1@166.507,58.268 ; EC1.1@167.107,58.268 EC1.1@167.107,58.572 ; EC1.1@167.107,58.268 EC1.1@167.107,58.572 ; EC1.1@167.107,58.868 cw(c167.107,59.581) 166.602,59.077 ccw(c167.107,59.581) EC1.1@167.107,58.868 ; 166.38,59.299 cw(c165.348,58.268) 166.807,58.268 ccw(c165.348,58.268) 166.38,59.299
NetEC2_1: EC2.1 OLED1.10 | length 13.4
  Bottom Layer w0.25: OLED1.10@166.315,65.62 166.315,63.047 ; EC2.1@166.665,61.25 ccw(c165.844,62.07) 167.005,62.07 ; EC2.1@166.813,61.359 ccw(c166.416,62.103) 167.259,62.103 ; EC2.1@166.93,61.138 ccw(c166.638,61.686) 167.259,61.686 ; EC2.1@167.005,60.96 167.005,62.357 ; 167.005,61.824 ccw(c167.952,61.824) EC2.1@167.347,61.096 ; 167.005,62.103 166.315,62.793 166.315,63.047 ; EC2.1@167.259,60.579 167.259,62.103 ; 167.259,61.95 ccw(c168.249,61.95) EC2.1@167.549,61.25 ; EC2.1@167.506,61.288 cw(c168.394,62.357) 167.005,62.357 ; 166.315,63.047 167.005,62.357 ; 167.005,62.357 167.259,62.103
NetJ1_6: J1.6 R28.1 | length 20
  Bottom Layer w0.2: J1.6@203.86,75.963 204.707,75.963 ; J1.6@204.416,75.793 cw(c204.706,75.631) 204.706,75.963 ; J1.6@204.416,76.134 ccw(c204.706,76.296) 204.706,75.963 ; R28.1@204.724,72.072 205.232,72.581 205.232,75.438 204.707,75.963
  Bottom Layer w0.35: J1.6@204.068,76.026 cw(c204.35,75.61) 204.705,75.965 ; J1.6@204.107,76.038 cw(c204.156,74.893) 204.966,75.704 ; J1.6@204.11,75.688 cw(c204.11,74.505) 204.947,75.342 ; J1.6@204.265,75.736 cw(c204.592,75.253) 205.005,75.665 ; J1.6@204.32,75.785 cw(c204.706,75.455) 204.706,75.963 ; J1.6@204.32,76.142 ccw(c204.706,76.472) 204.706,75.963 ; R28.1@204.56,72.274 ccw(c202.939,73.896) 205.232,73.896 ; R28.1@204.724,72.072 205.232,72.581 205.232,75.438 204.707,75.963 ; R28.1@204.808,72.027 ccw(c203.784,73.051) 205.232,73.051 ; 205.232,75.057 204.326,75.963 J1.6@203.86,75.963 204.707,75.963
NetJ1_7: J1.7 RP2.8 | length 11.8
  Bottom Layer w0.2: RP2.8@196.626,74.152 cw(c196.626,73.558) 197.046,73.978 ; RP2.8@196.626,74.398 197.276,73.748 197.276,73.107 197.612,72.771 202.667,72.771 J1.7@203.86,73.964 ; RP2.8@196.876,74.402 ccw(c197.489,74.402) 197.056,73.968 ; 202.836,72.94 ccw(c201.812,73.964) J1.7@203.26,73.964 ; 203.178,73.281 ccw(c202.495,73.964) J1.7@203.46,73.964 ; J1.7@203.44,73.543 cw(c203.61,73.373) J1.7@203.61,73.614
NetJ1_12: J1.12 RP2.5 | length 8.9
  Bottom Layer w0.2: RP2.5@193.849,75.079 ccw(c193.314,75.614) 194.071,75.614 ; RP2.5@194.026,74.398 194.071,74.443 194.071,76.215 194.691,76.835 196.977,76.835 J1.12@198.105,77.963 ; 194.071,75.397 ccw(c194.521,75.397) RP2.5@194.203,75.079 ; 197.497,77.355 ccw(c196.889,77.963) J1.12@197.749,77.963 ; 197.512,77.37 cw(c198.099,76.783) J1.12@198.099,77.613
NetJ1_13: J1.13 RP2.6 | length 5.9
  Bottom Layer w0.2: RP2.6@194.82,75.108 ccw(c194.564,75.364) 194.926,75.364 ccw(c195.288,75.364) RP2.6@195.032,75.108 ; RP2.6@194.926,74.398 194.926,76.054 195.199,76.327 197.985,76.327 J1.13@198.349,75.963
NetJ1_14: J1.14 RP2.7 | length 7
  Bottom Layer w0.2: RP2.7@195.62,75.108 ccw(c195.364,75.364) 195.726,75.364 ccw(c196.088,75.364) RP2.7@195.832,75.108 ; RP2.7@195.726,74.398 195.726,75.584 195.961,75.819 196.977,75.819 197.276,75.52 197.276,74.758 198.07,73.964 J1.14@198.349,73.964 ; 197.452,74.582 ccw(c198.099,75.228) J1.14@198.099,74.314 ; 197.521,74.513 cw(c196.973,73.964) J1.14@197.749,73.964
NetJ3_3: J3.3 U1.6 | length 5.1
  Bottom Layer w0.25: U1.6@168.619,93.472 U1.6@168.705,93.558
  Bottom Layer w0.45: J3.3@165.761,93.472 165.847,93.558 U1.6@168.705,93.558 ; J3.3@166.235,93.348 cw(c166.741,92.842) 166.741,93.558 ; U1.6@168.09,93.293 ccw(c167.45,92.653) 167.45,93.558 ccw(c167.45,94.463) U1.6@168.09,93.823
NetLED1_1: LED1.1 R3.2 | length 52.1
  Top Layer w0.25: v1@193.262,76.232 ccw(c192.545,76.949) 193.559,76.949 ; v1(193.421,76.073) 193.559,76.211 193.559,88.911 v1(193.675,89.027) ; 193.559,88.204 cw(c194.498,88.204) v1@193.834,88.868
  Bottom Layer w0.25: R3.2@187.007,75.311 192.659,75.311 v1(193.421,76.073) ; R3.2@187.245,75.112 cw(c187.725,74.632) 187.725,75.311 cw(c187.725,75.99) R3.2@187.245,75.51 ; v1@193.196,76.073 cw(c192.653,76.073) 193.037,75.689 cw(c193.421,75.305) v1@193.421,75.848 ; v1@193.657,89.045 cw(c194.131,88.571) 194.131,89.241 ; v1(193.675,89.027) 193.889,89.241 197.699,89.241 198.247,89.789 198.247,99.695 198.628,100.076 207.137,100.076 207.772,100.711 ; v1@193.834,88.868 cw(c194.735,87.967) 194.735,89.241 ; LED1.1@207.467,101.318 cw(c207.015,100.711) 207.772,100.711 ; LED1.1@207.772,101.854 207.772,100.711 ; LED1.1@208.077,101.318 ccw(c208.529,100.711) 207.772,100.711
NetLED2_1: LED2.1 R6.2 | length 75.1
  Top Layer w0.25: v1@192.5,77.121 ccw(c192.116,77.505) 192.659,77.505 ccw(c193.202,77.505) v1@192.818,77.121 ; v1@192.5,88.868 cw(c192.116,88.484) 192.659,88.484 cw(c193.202,88.484) v1@192.818,88.868 ; v1(192.659,76.962) v1(192.659,89.027)
  Bottom Layer w0.25: LED2.1@161.798,101.473 162.179,101.473 162.56,101.092 195.834,101.092 196.85,100.076 196.85,90.678 196.088,89.916 192.913,89.916 192.659,89.662 v1(192.659,89.027) ; LED2.1@161.914,101.23 cw(c162.088,100.493) 162.623,101.029 ; LED2.1@162.308,101.727 ccw(c163.233,101.727) 162.579,101.073 ; R6.2@187.007,76.558 187.238,76.327 192.024,76.327 v1(192.659,76.962) ; R6.2@187.068,76.58 ccw(c187.679,77.191) 187.679,76.327 ; R6.2@187.245,76.757 ccw(c188.282,77.795) 188.282,76.327 ; v1@192.434,76.962 cw(c191.891,76.962) 192.275,76.578 cw(c192.659,76.194) v1@192.659,76.737 ; v1@192.5,89.186 ccw(c192.116,89.57) 192.659,89.57 ccw(c193.202,89.57) v1@192.818,89.186
NetLED3_1: LED3.1 R5.2 | length 47.7
  Top Layer w0.25: v1(168.656,56.642) 171.704,56.642 172.045,56.983 172.045,66.889 172.57,67.414 187.429,67.414 187.833,67.818 v1(187.833,72.771) ; v1@168.815,56.483 cw(c169.199,56.099) 169.199,56.642 cw(c169.199,57.185) v1@168.815,56.801 ; v1@187.674,72.612 cw(c187.29,72.228) 187.833,72.228 cw(c188.376,72.228) v1@187.992,72.612
  Bottom Layer w0.25: LED3.1@161.798,56.007 168.021,56.007 v1(168.656,56.642) ; LED3.1@162.159,55.646 cw(c163.029,54.776) 163.029,56.007 cw(c163.029,57.238) LED3.1@162.159,56.368 ; v1@168.431,56.642 cw(c167.888,56.642) 168.272,56.258 cw(c168.656,55.874) v1@168.656,56.417
  Bottom Layer w0.45: R5.2@187.007,72.771 v1(187.833,72.771) ; R5.2@187.174,72.643 cw(c187.484,72.333) 187.484,72.771 cw(c187.484,73.209) R5.2@187.174,72.899